# Altium PCB Parallel_CS.PcbDoc (part 2 of 3)
Units mm, origin at the board's own origin, x right, y up, seen from the top; angles counter-clockwise.
Board outline 81.03 x 171.07 mm, 4 copper layers (Top Layer, Ground Plane, Power Plane, Bottom Layer), stack 0.778 mm thick; 393 components, 189 nets, 1068 pads, 234 vias.
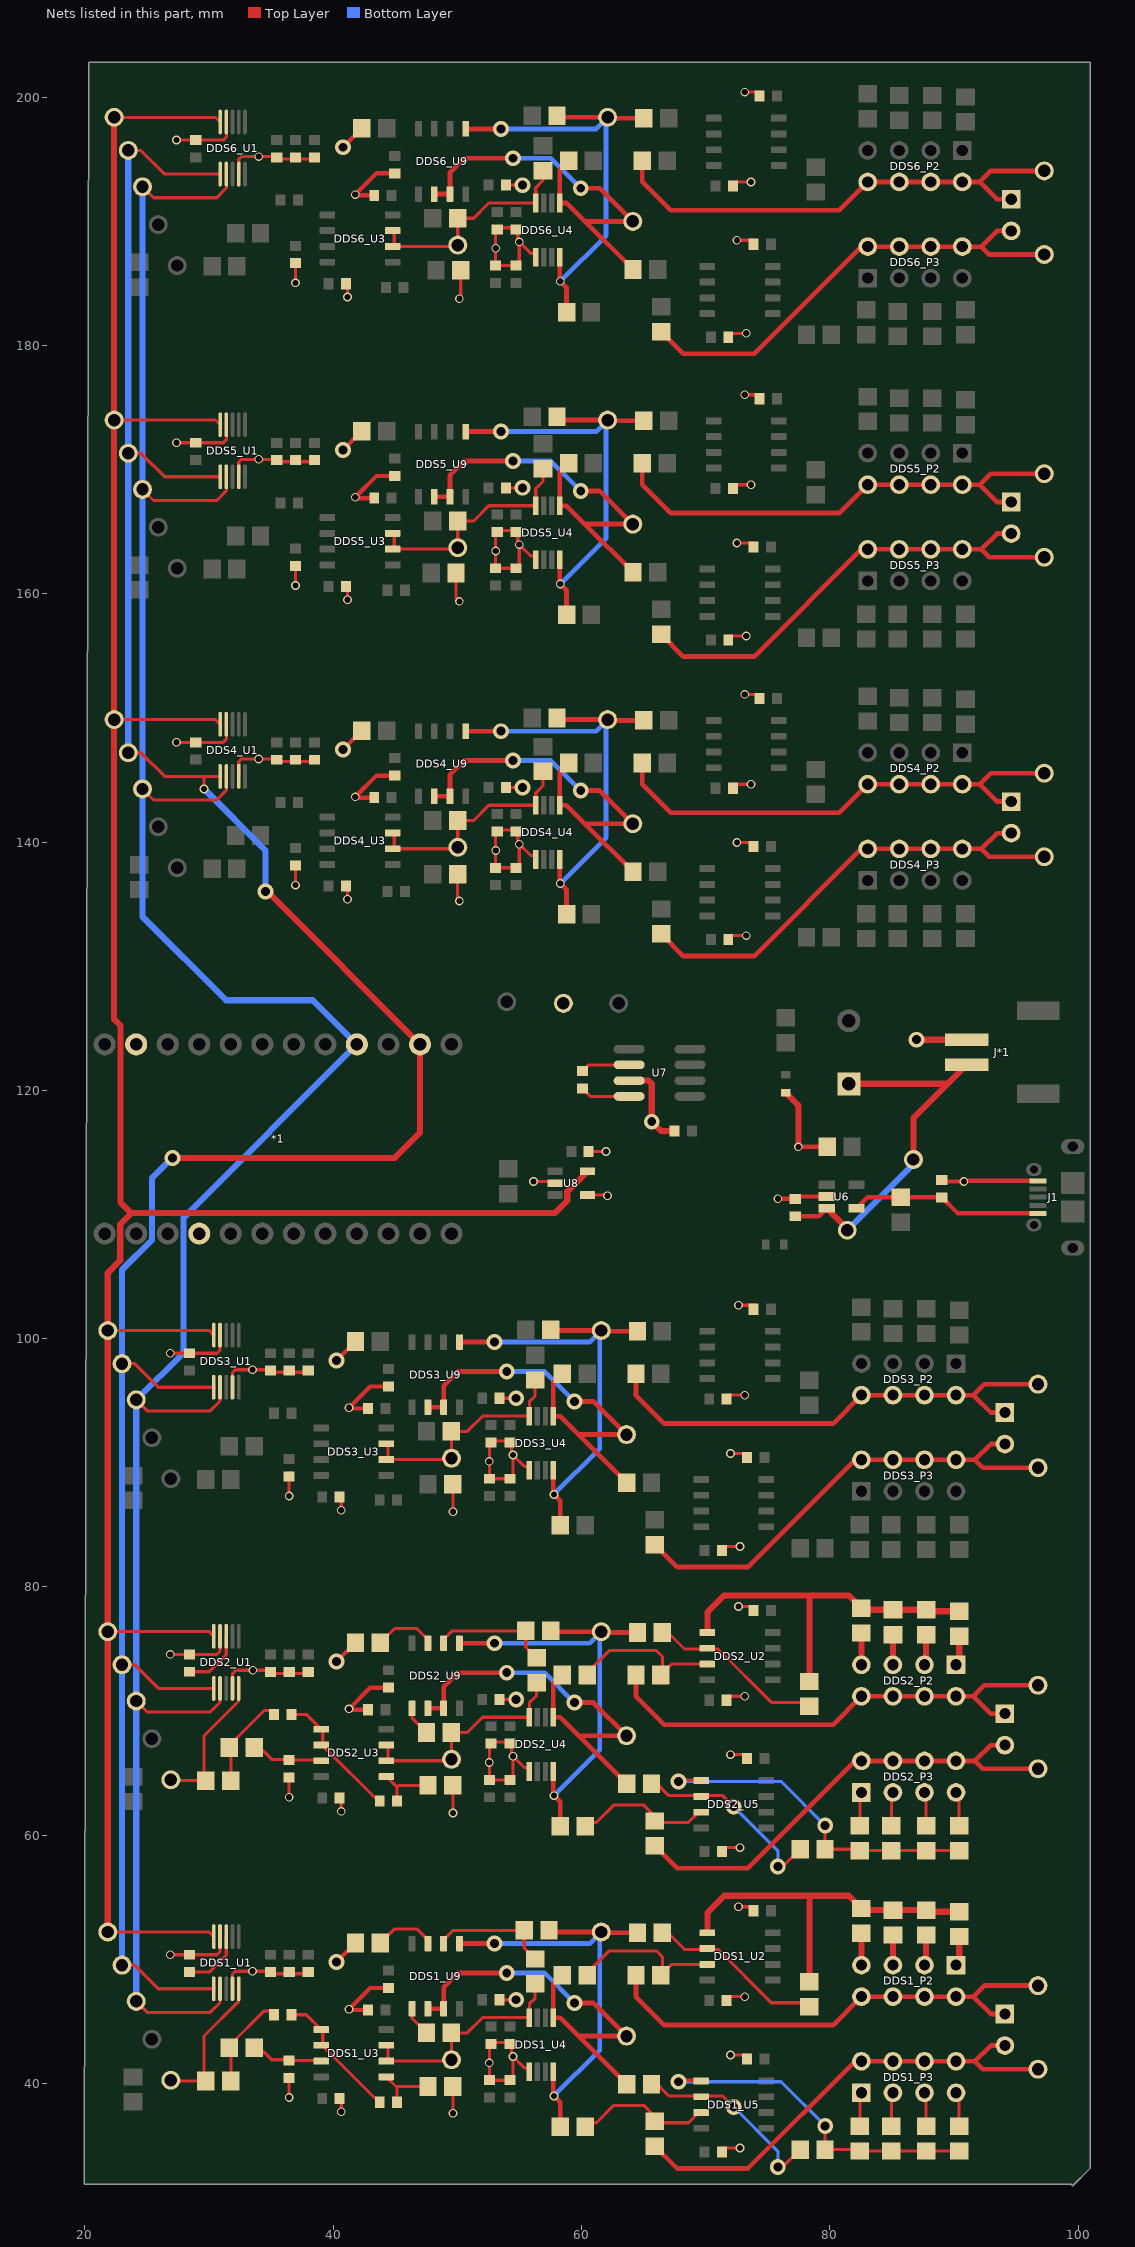
[diagram p4: the nets of this part, all layers, seen from the top]

## Part data
C18 C19 C20 C21 C22 DDS1_C1 DDS1_C2 DDS1_C3 DDS1_C4 DDS1_C5 DDS1_C6 DDS1_C7 DDS1_C8 DDS1_C9 DDS1_C10 DDS1_C11 DDS1_C12 DDS1_C13 DDS1_C14 DDS1_C15 DDS1_C16 DDS1_C17 DDS1_C23 DDS1_C24 DDS2_C1 DDS2_C2 DDS2_C3 DDS2_C4 DDS2_C5 DDS2_C6 DDS2_C7 DDS2_C8 DDS2_C9 DDS2_C10 DDS2_C11 DDS2_C12 DDS2_C13 DDS2_C14 DDS2_C15 DDS2_C16 DDS2_C17 DDS2_C23 DDS2_C24 DDS3_C1 DDS3_C2 DDS3_C3 DDS3_C4 DDS3_C5 DDS3_C6 DDS3_C7 DDS3_C8 DDS3_C9 DDS3_C10 DDS3_C11 DDS3_C12 DDS3_C13 DDS3_C14 DDS3_C15 DDS3_C16 DDS3_C17 DDS3_C23 DDS3_C24 DDS4_C1 DDS4_C2 DDS4_C3 DDS4_C4 DDS4_C5 DDS4_C6 DDS4_C7 DDS4_C8 DDS4_C9 DDS4_C10 DDS4_C11 DDS4_C12 DDS4_C13 DDS4_C14 DDS4_C15 DDS4_C16 DDS4_C17 DDS4_C23 DDS4_C24 DDS5_C1 DDS5_C2 DDS5_C3 DDS5_C4 DDS5_C5 DDS5_C6 DDS5_C7 DDS5_C8 DDS5_C9 DDS5_C10 DDS5_C11 DDS5_C12 DDS5_C13 DDS5_C14 DDS5_C15 DDS5_C16 DDS5_C17 DDS5_C23 DDS5_C24 DDS6_C1 DDS6_C2 DDS6_C3 DDS6_C4 DDS6_C5 DDS6_C6 DDS6_C7 DDS6_C8 DDS6_C9 DDS6_C10 DDS6_C11 DDS6_C12 DDS6_C13 DDS6_C14 DDS6_C15 DDS6_C16 DDS6_C17 DDS6_C23 DDS6_C24: library part "Cap Semi", "Capacitor (Semiconductor SIM Model)", LatestRevisionDate=29-May-2009, LatestRevisionNote="IPC-7351 Footprint Added.", PackageDescription="Chip Capacitor", PackageReference=C1206, Published=8-Jun-2000, Publisher="Altium Limited"
DDS1_P1 DDS2_P1 DDS3_P1 DDS4_P1 DDS5_P1 DDS6_P1: "Header, 2-Pin", LatestRevisionDate=17-Jul-2002, LatestRevisionNote="Re-released for DXP Platform.", Publisher="Altium Limited"
DDS1_P2 DDS1_P3 DDS2_P2 DDS2_P3 DDS3_P2 DDS3_P3 DDS4_P2 DDS4_P3 DDS5_P2 DDS5_P3 DDS6_P2 DDS6_P3: "Header, 4-Pin, Dual row", LatestRevisionDate=17-Jul-2002, LatestRevisionNote="Re-released for DXP Platform.", Publisher="Altium Limited"
DDS1_R1 DDS1_R2 DDS1_R3 DDS1_R4 DDS1_R5 DDS1_R6 DDS1_R7 DDS1_R8 DDS1_R9 DDS1_R10 DDS1_R11 DDS1_R12 DDS1_R13 DDS1_R18 DDS1_R19 DDS1_R20 DDS1_R21 DDS1_R22 DDS1_R23 DDS1_R24 DDS1_R25 DDS1_R26 DDS1_R27 DDS1_R28 DDS2_R1 DDS2_R2 DDS2_R3 DDS2_R4 DDS2_R5 DDS2_R6 DDS2_R7 DDS2_R8 DDS2_R9 DDS2_R10 DDS2_R11 DDS2_R12 DDS2_R13 DDS2_R18 DDS2_R19 DDS2_R20 DDS2_R21 DDS2_R22 DDS2_R23 DDS2_R24 DDS2_R25 DDS2_R26 DDS2_R27 DDS2_R28 DDS3_R1 DDS3_R2 DDS3_R3 DDS3_R4 DDS3_R5 DDS3_R6 DDS3_R7 DDS3_R8 DDS3_R9 DDS3_R10 DDS3_R11 DDS3_R12 DDS3_R13 DDS3_R18 DDS3_R19 DDS3_R20 DDS3_R21 DDS3_R22 DDS3_R23 DDS3_R24 DDS3_R25 DDS3_R26 DDS3_R27 DDS3_R28 DDS4_R1 DDS4_R2 DDS4_R3 DDS4_R4 DDS4_R5 DDS4_R6 DDS4_R7 DDS4_R8 DDS4_R9 DDS4_R10 DDS4_R11 DDS4_R12 DDS4_R13 DDS4_R18 DDS4_R19 DDS4_R20 DDS4_R21 DDS4_R22 DDS4_R23 DDS4_R24 DDS4_R25 DDS4_R26 DDS4_R27 DDS4_R28 DDS5_R1 DDS5_R2 DDS5_R3 DDS5_R4 DDS5_R5 DDS5_R6 DDS5_R7 DDS5_R8 DDS5_R9 DDS5_R10 DDS5_R11 DDS5_R12 DDS5_R13 DDS5_R18 DDS5_R19 DDS5_R20 DDS5_R21 DDS5_R22 DDS5_R23 DDS5_R24 DDS5_R25 DDS5_R26 DDS5_R27 DDS5_R28 DDS6_R1 DDS6_R2 DDS6_R3 DDS6_R4 DDS6_R5 DDS6_R6 DDS6_R7 DDS6_R8 DDS6_R9 DDS6_R10 DDS6_R11 DDS6_R12 DDS6_R13 DDS6_R18 DDS6_R19 DDS6_R20 DDS6_R21 DDS6_R22 DDS6_R23 DDS6_R24 DDS6_R25 DDS6_R26 DDS6_R27 DDS6_R28 R14 R15 R16 R17: library part Res1, "Resistor", LatestRevisionDate=17-Jul-2002, LatestRevisionNote="Re-released for DXP Platform.", PackageDescription="Axial Device, Thru-Hole; 2 Leads; 0.3 in Pin Spacing", PackageReference=AXIAL-0.3, Published=8-Jun-2000, Publisher="Altium Limited"
DDS1_U1 DDS2_U1 DDS3_U1 DDS4_U1 DDS5_U1 DDS6_U1: library part CMP-0293-00077-1, "Low Power, 12.65 mW, 2.3 V to 5.5 V, Programmable Waveform Generator, 10-Bit, Serial, RM-10, 50 Tube, Pb-Free", Code_JEDEC=MO-187-BA, Compliance Range (V)=650mV, ComponentLink1Description="Manufacturer URL", ComponentLink1URL=www.analog.com, ComponentLink2Description=Datasheet, ComponentLink2URL=http://www.analog.com/static/imported-files/data_sheets/AD9833.pdf, ComponentLink3Description="Package Specification", ComponentLink3URL=http://www.analog.com/static/imported-files/packages/PKG_PDF/MSOP%28RM%29/RM_10.pdf, DatasheetVersion="Rev. D", FS Iout (mA nom)=3mA, I/O Interface=Serial, I Supply total (max)=5.5mA, Master fclk=25MHz, PackageDescription="10-Lead Mini Small Outline Package [MSOP]", PackageReference=RM-10, PackageVersion=5/8/2005, REFCLK Multiplier=No, Resolution (Bits)=10bit, Tuning Word Width (bits)=28bit
DDS1_U2 DDS1_U3 DDS1_U5 DDS1_U9 DDS2_U2 DDS2_U3 DDS2_U5 DDS2_U9 DDS3_U2 DDS3_U3 DDS3_U5 DDS3_U9 DDS4_U2 DDS4_U3 DDS4_U5 DDS4_U9 DDS5_U2 DDS5_U3 DDS5_U5 DDS5_U9 DDS6_U2 DDS6_U3 DDS6_U5 DDS6_U9: library part CMP-0272-00241-3, "0.03 uV/degC, 6 uV Vos, Low Noise, Rail-to-Rail Output, Zero-Drift Operational Amplifier, 4 to 36 V, -40 to 105 degC, 8-pin SOIC (D8), Green (RoHS & no Sb/Br)", Manufacturer="Texas Instruments", Rating=Catalog, Total Supply Voltage(Max)(+5V is 5, +/-5V is 10)=36, Total Supply Voltage(Min)(+5V is 5, +/-5V is 10)=4, CMRR(Min)(dB)=120, Code_JEDEC=MS-012, ComponentLink1Description="Manufacturer URL", ComponentLink1URL=http://www.ti.com/, ComponentLink2Description=Datasheet, ComponentLink2URL=http://www.ti.com/lit/ds/symlink/opa2188.pdf, ComponentLink3Description="Package Specification", ComponentLink3URL=http://www.ti.com/litv/pdf/msoi002j, DatasheetVersion=SBOS525B, Eco-Plan="Green (RoHS & no Sb/Br)", GBW(Typ)(MHz)=2, IIB(Max)(pA)=850, Iq per channel(Max)(mA)=0.475, Mounting Technology="Surface Mount", Number of Channels=2, Offset Drift(Typ)(uV/C)=0.03, PackageDescription="8-Pin Plastic Small Outline, Body 4.9 x 3.9 mm, Pitch 1.27 mm", PackageReference=D0008A, PackageVersion="4040047-3/M, 06/2011", Packing="LARGE T&R", PartId=1, PartNumber=OPA2188AIDR, Slew Rate(Typ)(V/us)=0.8, Sub Family="High Supply Voltage Amplifier (>=30V), Low Noise Amp (<=10nV/rtHz), Low Offset Voltage Amplifier (<=500uV), Low Power Amp (<=500uA), Precision Amplifier, Zero Drift Precision Amplifier", Vio (25C)(Max)(mV)=0.025
DDS1_U4 DDS2_U4 DDS3_U4 DDS4_U4 DDS5_U4 DDS6_U4: "SP Amp DIFF AMP Single R-R O/P ±9V/18V 8-Pin MSOP Tube", Package="MSOP-8 Analog Devices", Availability=Good, MF="Analog Devices", MP=AD8476ARMZ, Price="4.14 USD"
DS1 DS2: library part CMP-1666-00027-1, "LED, RED, 2.1 V, -40 to 100 degC, 2-Pin SMD (0603), RoHS, Tape and Reel", Capacitance="12 pF", Case/Package=0603, Case Code (Metric)=1608, Max Operating Temperature=125degC, Min Operating Temperature=-55degC, Package Quantity=4000, Resistance="100000000000 Ohm", Tolerance=5%, Type (Capacitors)=C0G, Voltage Rating="50 V", Case Code (Imperial)=0603, ComponentLink1Description="Manufacturer URL", ComponentLink1URL=http://www.vishay.com/, ComponentLink2Description=Datasheet, ComponentLink2URL=http://www.vishay.com/docs/83173/tlmb1100.pdf, DatasheetVersion="Rev. 2.7, 03/2016", Height="0.8 mm", Length="1.6 mm", Mount="Surface Mount", PackageDescription="2-Pin Surface Mount Device, Body 1.6 x 0.8 mm", PackageReference=TLMX1100, Packaging="Tape and Reel", Pins=2, Radiation Hardening=No, REACH SVHC="No SVHC", RoHSCompliant=True, Voltage Rating (DC)="50 V", Width="0.8 mm"
J1: library part CMP-1349-00001-2, "USB 2.0 Standard Micro-USB Connector, Micro AB-Standard (Bottom Mount), 30 V AC, -30 to 85 degC, Right Angle, 5-Pin 7.5 x 5.6 x 2.8 mm SMD, RoHS, Reel", Capacitance="2 pF Max.", Contact Resistance="30 mOhm Max.", Manufacturer="Hirose Electric", Operating Temperature Range="-30 to 85 degC", Voltage Rating="30 V AC", ComponentLink1Description="Manufacturer URL", ComponentLink1URL=http://www.hirose.com/, ComponentLink2Description=Datasheet, ComponentLink2URL=http://www.hirose.co.jp/cataloge_hp/ed_ZX_20140804.pdf, ComponentLink3Description="Package Specification", ComponentLink3URL=http://www.hirose.co.jp/cataloge_hp/ed_ZX_20140804.pdf, DatasheetVersion=Aug-14, Mounting Technology="Surface Mount", Number of Contacts=5, PackageDescription="USB Micro-AB Connector, Right Angle, Body 7.5 x 5.6 mm, Pitch 0.65 mm, Height 2.8 mm", Packing=Reel, PartNumber=ZX62D-AB-5P8, RoHS=TRUE
S1: "Single-Pole, Single-Throw Switch", LatestRevisionDate=17-Jul-2002, LatestRevisionNote="Re-released for DXP Platform.", PackageDescription="Switch; 2 Leads", PackageReference=SPST-2, Published=24-Mar-1999, Publisher="Altium Limited"
U6: library part CMP-0133-00142-1, "Miniature Single-Cell, Fully Integrated Li-Ion, Li-Polymer Charge Management Controller, 4.2V, 5-Pin SOT-23, Industrial Temperature, Tape and Reel", Code_IPC=SOT23-5, DatasheetVersion="revE, Sep-2008", PackageDescription="5-Lead Plastic Small Outline Transistor (OT) [SOT-23]", PackageReference=SOT-23-OT5, PackageVersion="revBB, Aug-2009"
U7: library part CMP-0475-00491-1, "12 V CMOS Voltage Converter, 8-pin SOIC (S8-8), 0 to 70 degC", Frequency(kHz)=5, Manufacturer="Linear Technology", ComponentLink1Description="Manufacturer URL", ComponentLink1URL=http://www.linear.com/, ComponentLink2Description=Datasheet, ComponentLink2URL=http://cds.linear.com/docs/en/datasheet/lt1044a.pdf, ComponentLink3Description="Package Specification", ComponentLink3URL=http://cds.linear.com/docs/en/packaging/05081610_G_SO8.pdf, DatasheetVersion="Rev. 0", Isupply(mA)=0.2, Max Iout(mA)=20, Mounting Technology="Surface Mount", PackageDescription="8-Pin Plastic Small Outline (Narrow .150 Inch), Body 4.9 x 3.9 mm, Pitch 1.27 mm", PackageReference=S8-8, PackageVersion="Rev. G, 03/2012", PartNumber=LTC1044ACS8, RoHS=FALSE, Vin Max(V)=12, Vin Min(V)=1.5, Voutput="2Vin, -Vin, 0.5Vin"
U8: library part CMP-2000-06612-1, "Low Power, Resistor Set Oscillator, 1 KHz to 20 MHz, 2.7 to 5.5 V, -40 to 85 degC, 5-Pin SOT-23 (S5), Pb-Free", Digital IC Case Style=SOT-23, Frequency=20MHz, Manufacturer="Linear Technology", Operating Temperature Max=85°C, Operating Temperature Min=-40°C, Operating Temperature Range=-40°Cto+85°C, Package Description="5-Pin Small Outline Transistor, Body 2.9 x 1.625 mm, Pitch 0.95 mm", Package Reference=TSOT23-5, Supply Voltage Max=5.5V, Supply Voltage Min=2.7V, Supply Voltage Range=2.7Vto5.5V, Base Number=6900, Clock External Input=No, Datasheet URL=http://cds.linear.com/docs/en/datasheet/6900fa.pdf, Datasheet Version="Rev. A, 07/2009", Manufacturer URL=http://www.linear.com/, Mounting Technology=SurfaceMount, MSL=MSL1-Unlimited, No. of Pins=5, Operating Frequency Max=20MHz, Package / Case=SOT-23, SVHC=NoSVHC(19-Dec-2012), Termination Type=SMD

## Via types
v1: diameter 0.7, hole 0.5, Top Layer to Bottom Layer, 143 vias
v2: diameter 1.27, hole 0.711, Top Layer to Bottom Layer, 76 vias
v3: diameter 1.27, hole 0.711, Top Layer to Bottom Layer, tented both sides, 9 vias
v4: diameter 1.5, hole 1, Top Layer to Bottom Layer, 6 vias

## Nets (pads, with @x,y where several pads share a name; then routed paths per layer and width w, separated by ;. In a path a pad name is that pad's centre, name@x,y a point inside that pad or via, vN(x,y) a via of type N, cw(c..) or ccw(c..) an arc to the next point about the centre after c; other vN are vias at no path point)
DDS1_DDS_CLK: DDS1_TP6.1 DDS1_U1.5 DDS2_TP6.1 DDS2_U1.5 DDS3_TP6.1 DDS3_U1.5 DDS4_TP6.1 DDS4_U1.5 DDS5_TP6.1 DDS5_U1.5 DDS6_TP6.1 DDS6_U1.5 U8.5 | length 238.3
  Top Layer w0.254: DDS1_TP6.1@21.844,52.197 30.013,52.197 DDS1_U1.5@30.385,51.825 ; DDS2_TP6.1@21.844,76.392 30.013,76.392 DDS2_U1.5@30.385,76.02 ; DDS3_TP6.1@21.844,100.649 30.013,100.649 DDS3_U1.5@30.385,100.277 ; DDS4_TP6.1@22.352,149.86 30.521,149.86 DDS4_U1.5@30.893,149.488 ; DDS5_TP6.1@22.352,173.99 30.521,173.99 DDS5_U1.5@30.893,173.618 ; DDS6_TP6.1@22.352,198.374 30.521,198.374 DDS6_U1.5@30.893,198.002
  Top Layer w0.5: DDS1_TP6.1@21.844,52.197 DDS2_TP6.1@21.844,76.392 DDS3_TP6.1@21.844,100.649 21.844,105.283 22.854,106.293 22.854,109.214 23.749,110.109 ; DDS6_TP6.1@22.352,198.374 DDS5_TP6.1@22.352,173.99 DDS4_TP6.1@22.352,149.86 22.352,125.73 22.86,125.222 22.86,110.998 23.749,110.109 ; U8.5@60.492,113.472 58.857,111.837 58.857,111.107 57.859,110.109 23.749,110.109
DDS1_DDS_FILT_OUT: DDS1_R26.2 DDS1_R28.2 DDS1_TP2.1 DDS1_U3.6 DDS1_U3.7 DDS1_U4.8 | length 18.3
  Top Layer w0.254: DDS1_U3.6@44.281,41.799 49.419,41.799 DDS1_TP2.1@49.53,41.91 49.53,44.053 DDS1_R28.2@49.514,44.069 50.8,44.069 52.03,45.299 DDS1_U4.8@55.804,45.299 55.804,46.406 56.261,46.863 DDS1_R26.2@56.261,48.022 ; DDS1_U3.6@44.408,41.91 DDS1_U3.7@44.408,43.053
DDS1_I_OUT_N: DDS1_P1.2 DDS1_P3.2 DDS1_P3.4 DDS1_P3.6 DDS1_P3.8 DDS1_R13.2 DDS1_TP8.1 | length 38.1
  Top Layer w0.381: DDS1_R13.2@66.278,34.941 DDS1_R13.2@65.913,34.941 67.707,33.147 73.406,33.147 82.042,41.783 DDS1_P3.2@82.55,41.783 DDS1_P3.4@85.09,41.783 DDS1_P3.6@87.63,41.783 DDS1_P3.8@90.17,41.783 91.694,41.783 ; DDS1_P1.2@94.107,43.053 92.964,43.053 91.694,41.783 ; DDS1_TP8.1@96.139,41.148 92.329,41.148 91.694,41.783
DDS1_I_OUT_P: DDS1_P1.1 DDS1_P2.2 DDS1_P2.4 DDS1_P2.6 DDS1_P2.8 DDS1_R8.2 DDS1_TP7.1 | length 38.8
  Top Layer w0.381: DDS1_R8.2@64.389,48.703 64.389,46.99 66.675,44.704 80.264,44.704 DDS1_P2.8@82.55,46.99 DDS1_P2.6@85.09,46.99 DDS1_P2.4@87.63,46.99 DDS1_P2.2@90.17,46.99 91.567,46.99 ; DDS1_P1.1@94.107,45.593 92.964,45.593 91.567,46.99 ; DDS1_TP7.1@96.139,47.879 92.456,47.879 91.567,46.99
DDS1_SPI_SCLK: *1.21 DDS1_TP4.1 DDS1_U1.7 DDS2_TP4.1 DDS2_U1.7 DDS3_TP4.1 DDS3_U1.7 DDS4_TP4.1 DDS4_U1.7 DDS5_TP4.1 DDS5_U1.7 DDS6_TP4.1 DDS6_U1.7 | length 216.2
  Top Layer w0.254: DDS1_TP4.1@24.13,46.609 25.019,45.72 30.099,45.72 30.885,46.506 DDS1_U1.7@30.885,47.625 ; DDS2_TP4.1@24.13,70.804 25.019,69.915 30.099,69.915 30.885,70.701 DDS2_U1.7@30.885,71.82 ; DDS3_TP4.1@24.13,95.061 25.019,94.172 30.099,94.172 30.885,94.958 DDS3_U1.7@30.885,96.077 ; DDS4_TP4.1@24.638,144.272 25.527,143.383 30.607,143.383 31.393,144.169 DDS4_U1.7@31.393,145.288 ; DDS5_TP4.1@24.638,168.402 25.527,167.513 30.607,167.513 31.393,168.299 DDS5_U1.7@31.393,169.418 ; DDS6_TP4.1@24.638,192.786 25.527,191.897 30.607,191.897 31.393,192.683 DDS6_U1.7@31.393,193.802
  Bottom Layer w0.5: DDS1_TP4.1@24.13,46.609 DDS2_TP4.1@24.13,70.804 DDS3_TP4.1@24.13,95.061 24.139,95.061 27.946,98.868 27.946,109.734 *1.21@41.91,123.698 38.354,127.254 31.369,127.254 24.638,133.985 DDS4_TP4.1@24.638,144.272 DDS5_TP4.1@24.638,168.402 DDS6_TP4.1@24.638,192.786
DDS1_SPI_SDATA: *1.23 DDS1_TP5.1 DDS1_U1.6 DDS2_TP5.1 DDS2_U1.6 DDS3_TP5.1 DDS3_U1.6 DDS4_TP5.1 DDS4_U1.6 DDS5_TP5.1 DDS5_U1.6 DDS6_TP5.1 DDS6_U1.6 | length 221.1
  Top Layer w0.254: DDS1_TP5.1@22.987,49.53 24.003,49.53 25.908,47.625 DDS1_U1.6@30.385,47.625 ; DDS2_TP5.1@22.987,73.725 24.003,73.725 25.908,71.82 DDS2_U1.6@30.385,71.82 ; DDS3_TP5.1@22.987,97.982 24.003,97.982 25.908,96.077 DDS3_U1.6@30.385,96.077 ; DDS4_TP5.1@23.495,147.193 24.511,147.193 26.416,145.288 29.591,145.288 ; DDS5_TP5.1@23.495,171.323 24.511,171.323 26.416,169.418 DDS5_U1.6@30.893,169.418 ; DDS6_TP5.1@23.495,195.707 24.511,195.707 26.416,193.802 DDS6_U1.6@30.893,193.802 ; v1(29.591,144.272) 29.591,145.288 ; DDS4_U1.6@30.893,145.288 29.591,145.288
  Top Layer w0.5: v3(27.051,114.554) 44.958,114.554 46.99,116.586 *1.23@46.99,123.698 34.671,136.017 v2(34.544,136.017)
  Bottom Layer w0.5: DDS1_TP5.1@22.987,49.53 DDS2_TP5.1@22.987,73.725 DDS3_TP5.1@22.987,97.982 22.987,105.527 25.394,107.934 25.394,112.897 v3(27.051,114.554) ; DDS4_TP5.1@23.495,147.193 DDS5_TP5.1@23.495,171.323 DDS6_TP5.1@23.495,195.707 ; v1(29.591,144.272) 34.544,139.319 v2(34.544,136.017)
DDS1_VDIFF_N: DDS1_R7.1 DDS1_R9.1 DDS1_TP10.1 DDS1_U4.5 DDS1_U9.6 DDS1_U9.7 | length 36
  Top Layer w0.381: DDS1_U9.6@47.625,46.016 DDS1_U9.7@48.895,46.016 48.895,47.752 50.038,48.895 v2(53.975,48.895) ; DDS1_R7.1@58.452,48.703 57.734,47.985 DDS1_U4.5@57.734,45.299 58.284,45.299 59.768,43.815 ; v2(59.436,46.482) 60.96,46.482 DDS1_TP10.1@63.627,43.815 59.768,43.815 ; DDS1_R9.1@63.643,39.94 59.768,43.815
  Bottom Layer w0.381: v2(53.975,48.895) 57.023,48.895 v2(59.436,46.482)
DDS1_VDIFF_P: DDS1_R1.1 DDS1_R12.1 DDS1_R25.1 DDS1_TP9.1 DDS1_U4.4 DDS1_U9.1 | length 38.1
  Top Layer w0.381: DDS1_U9.1@50.181,51.282 DDS1_U9.1@50.165,51.266 v2(53.001,51.266) ; DDS1_R25.1@57.515,52.197 DDS1_TP9.1@61.595,52.197 61.66,52.132 DDS1_R1.1@64.516,52.132 ; DDS1_U4.4@57.734,40.931 57.734,39.04 v1(57.785,38.989) 58.293,38.481 DDS1_R12.1@58.293,36.511
  Bottom Layer w0.381: v2(53.001,51.266) 60.664,51.266 DDS1_TP9.1@61.468,52.07 ; v1(57.785,38.989) 61.468,42.672 DDS1_TP9.1@61.468,52.07 ; DDS1_TP9.1@61.595,52.197 DDS1_TP9.1@61.468,52.07
DDS2_DDS_FILT_OUT: DDS2_R26.2 DDS2_R28.2 DDS2_TP2.1 DDS2_U3.6 DDS2_U3.7 DDS2_U4.8 | length 18.4
  Top Layer w0.254: DDS2_U3.6@44.281,65.994 49.419,65.994 DDS2_TP2.1@49.53,66.105 49.53,68.248 DDS2_R28.2@49.514,68.264 50.8,68.264 52.03,69.494 DDS2_U4.8@55.804,69.494 55.804,70.663 56.388,71.247 DDS2_R26.2@56.388,72.279 ; DDS2_U3.6@44.408,66.105 DDS2_U3.7@44.408,67.248
DDS2_I_OUT_N: DDS2_P1.2 DDS2_P3.2 DDS2_P3.4 DDS2_P3.6 DDS2_P3.8 DDS2_R13.2 DDS2_TP8.1 | length 38.1
  Top Layer w0.381: DDS2_R13.2@66.278,59.136 DDS2_R13.2@65.913,59.136 67.707,57.342 73.406,57.342 82.042,65.978 DDS2_P3.2@82.55,65.978 DDS2_P3.4@85.09,65.978 DDS2_P3.6@87.63,65.978 DDS2_P3.8@90.17,65.978 91.694,65.978 ; DDS2_P1.2@94.107,67.248 92.964,67.248 91.694,65.978 ; DDS2_TP8.1@96.139,65.343 92.329,65.343 91.694,65.978
DDS2_I_OUT_P: DDS2_P1.1 DDS2_P2.2 DDS2_P2.4 DDS2_P2.6 DDS2_P2.8 DDS2_R8.2 DDS2_TP7.1 | length 38.8
  Top Layer w0.381: DDS2_R8.2@64.389,72.898 64.389,71.185 66.675,68.899 80.264,68.899 DDS2_P2.8@82.55,71.185 91.567,71.185 ; DDS2_P1.1@94.107,69.788 92.964,69.788 91.567,71.185 ; DDS2_TP7.1@96.139,72.074 92.456,72.074 91.567,71.185
DDS2_VDIFF_N: DDS2_R7.1 DDS2_R9.1 DDS2_TP10.1 DDS2_U4.5 DDS2_U9.6 DDS2_U9.7 | length 36
  Top Layer w0.381: DDS2_U9.6@47.625,70.211 DDS2_U9.7@48.895,70.211 48.895,71.947 50.038,73.09 v2(53.975,73.09) ; DDS2_R7.1@58.452,72.898 57.734,72.18 DDS2_U4.5@57.734,69.494 58.284,69.494 59.768,68.01 ; v2(59.436,70.677) 60.96,70.677 DDS2_TP10.1@63.627,68.01 59.768,68.01 ; DDS2_R9.1@63.643,64.135 59.768,68.01
  Bottom Layer w0.381: v2(53.975,73.09) 57.023,73.09 v2(59.436,70.677)
DDS2_VDIFF_P: DDS2_R1.1 DDS2_R12.1 DDS2_R25.1 DDS2_TP9.1 DDS2_U4.4 DDS2_U9.1 | length 38.1
  Top Layer w0.381: DDS2_U9.1@50.181,75.477 DDS2_U9.1@50.165,75.461 v2(53.001,75.461) ; DDS2_R25.1@57.515,76.392 DDS2_TP9.1@61.595,76.392 61.66,76.327 DDS2_R1.1@64.516,76.327 ; DDS2_U4.4@57.734,65.126 57.734,63.235 v1(57.785,63.184) 58.293,62.676 DDS2_R12.1@58.293,60.706
  Bottom Layer w0.381: v2(53.001,75.461) 60.664,75.461 DDS2_TP9.1@61.468,76.265 ; v1(57.785,63.184) 61.468,66.867 DDS2_TP9.1@61.468,76.265 ; DDS2_TP9.1@61.595,76.392 DDS2_TP9.1@61.468,76.265
DDS3_DDS_FILT_OUT: DDS3_R26.2 DDS3_R28.2 DDS3_TP2.1 DDS3_U3.6 DDS3_U3.7 DDS3_U4.8 | length 18.5
  Top Layer w0.254: DDS3_U3.6@44.281,90.251 49.419,90.251 DDS3_TP2.1@49.53,90.362 49.53,92.505 DDS3_R28.2@49.514,92.521 50.8,92.521 52.03,93.751 DDS3_U4.8@55.804,93.751 55.804,94.92 56.261,95.377 DDS3_R26.2@56.261,96.663 ; DDS3_U3.6@44.408,90.362 DDS3_U3.7@44.408,91.505
DDS3_I_OUT_N: DDS3_P1.2 DDS3_P3.2 DDS3_P3.4 DDS3_P3.6 DDS3_P3.8 DDS3_R13.2 DDS3_TP8.1 | length 38.1
  Top Layer w0.381: DDS3_R13.2@66.278,83.393 DDS3_R13.2@65.913,83.393 67.707,81.599 73.406,81.599 82.042,90.235 DDS3_P3.2@82.55,90.235 DDS3_P3.4@85.09,90.235 DDS3_P3.6@87.63,90.235 DDS3_P3.8@90.17,90.235 91.694,90.235 ; DDS3_P1.2@94.107,91.505 92.964,91.505 91.694,90.235 ; DDS3_TP8.1@96.139,89.6 92.329,89.6 91.694,90.235
DDS3_I_OUT_P: DDS3_P1.1 DDS3_P2.2 DDS3_P2.4 DDS3_P2.6 DDS3_P2.8 DDS3_R8.2 DDS3_TP7.1 | length 38.8
  Top Layer w0.381: DDS3_R8.2@64.389,97.155 64.389,95.442 66.675,93.156 80.264,93.156 DDS3_P2.8@82.55,95.442 91.567,95.442 ; DDS3_P1.1@94.107,94.045 92.964,94.045 91.567,95.442 ; DDS3_TP7.1@96.139,96.331 92.456,96.331 91.567,95.442
DDS3_VDIFF_N: DDS3_R7.1 DDS3_R9.1 DDS3_TP10.1 DDS3_U4.5 DDS3_U9.6 DDS3_U9.7 | length 36
  Top Layer w0.381: DDS3_U9.6@47.625,94.468 DDS3_U9.7@48.895,94.468 48.895,96.204 50.038,97.347 v2(53.975,97.347) ; DDS3_R7.1@58.452,97.155 57.734,96.437 DDS3_U4.5@57.734,93.751 58.284,93.751 59.768,92.267 ; v2(59.436,94.934) 60.96,94.934 DDS3_TP10.1@63.627,92.267 59.768,92.267 ; DDS3_R9.1@63.643,88.392 59.768,92.267
  Bottom Layer w0.381: v2(53.975,97.347) 57.023,97.347 v2(59.436,94.934)
DDS3_VDIFF_P: DDS3_R1.1 DDS3_R12.1 DDS3_R25.1 DDS3_TP9.1 DDS3_U4.4 DDS3_U9.1 | length 38.1
  Top Layer w0.381: DDS3_U9.1@50.181,99.734 DDS3_U9.1@50.165,99.718 v2(53.001,99.718) ; DDS3_R25.1@57.515,100.649 DDS3_TP9.1@61.595,100.649 61.66,100.584 DDS3_R1.1@64.516,100.584 ; DDS3_U4.4@57.734,89.383 57.734,87.492 v1(57.785,87.441) 58.293,86.933 DDS3_R12.1@58.293,84.963
  Bottom Layer w0.381: v2(53.001,99.718) 60.664,99.718 DDS3_TP9.1@61.468,100.522 ; v1(57.785,87.441) 61.468,91.124 DDS3_TP9.1@61.468,100.522 ; DDS3_TP9.1@61.595,100.649 DDS3_TP9.1@61.468,100.522
DDS4_DDS_FILT_OUT: DDS4_R26.2 DDS4_R28.2 DDS4_TP2.1 DDS4_U3.6 DDS4_U3.7 DDS4_U4.8 | length 18.4
  Top Layer w0.254: DDS4_U3.6@44.789,139.462 49.927,139.462 DDS4_TP2.1@50.038,139.573 50.038,141.716 DDS4_R28.2@50.022,141.732 51.308,141.732 52.538,142.962 DDS4_U4.8@56.312,142.962 56.312,143.942 56.896,144.526 DDS4_R26.2@56.896,145.685 ; DDS4_U3.6@44.916,139.573 DDS4_U3.7@44.916,140.716
DDS4_I_OUT_N: DDS4_P1.2 DDS4_P3.2 DDS4_P3.4 DDS4_P3.6 DDS4_P3.8 DDS4_R13.2 DDS4_TP8.1 | length 38.1
  Top Layer w0.381: DDS4_R13.2@66.786,132.604 DDS4_R13.2@66.421,132.604 68.215,130.81 73.914,130.81 82.55,139.446 DDS4_P3.2@83.058,139.446 DDS4_P3.4@85.598,139.446 DDS4_P3.6@88.138,139.446 DDS4_P3.8@90.678,139.446 92.202,139.446 ; DDS4_P1.2@94.615,140.716 93.472,140.716 92.202,139.446 ; DDS4_TP8.1@96.647,138.811 92.837,138.811 92.202,139.446
DDS4_I_OUT_P: DDS4_P1.1 DDS4_P2.2 DDS4_P2.4 DDS4_P2.6 DDS4_P2.8 DDS4_R8.2 DDS4_TP7.1 | length 38.8
  Top Layer w0.381: DDS4_R8.2@64.897,146.366 64.897,144.653 67.183,142.367 80.772,142.367 DDS4_P2.8@83.058,144.653 DDS4_P2.6@85.598,144.653 DDS4_P2.4@88.138,144.653 DDS4_P2.2@90.678,144.653 92.075,144.653 ; DDS4_P1.1@94.615,143.256 93.472,143.256 92.075,144.653 ; DDS4_TP7.1@96.647,145.542 92.964,145.542 92.075,144.653
DDS4_VDIFF_N: DDS4_R7.1 DDS4_R9.1 DDS4_TP10.1 DDS4_U4.5 DDS4_U9.6 DDS4_U9.7 | length 36
  Top Layer w0.381: DDS4_U9.6@48.133,143.679 DDS4_U9.7@49.403,143.679 49.403,145.415 50.546,146.558 v2(54.483,146.558) ; DDS4_R7.1@58.96,146.366 58.242,145.648 DDS4_U4.5@58.242,142.962 58.792,142.962 60.276,141.478 ; v2(59.944,144.145) 61.468,144.145 DDS4_TP10.1@64.135,141.478 60.276,141.478 ; DDS4_R9.1@64.151,137.603 60.276,141.478
  Bottom Layer w0.381: v2(54.483,146.558) 57.531,146.558 v2(59.944,144.145)
DDS4_VDIFF_P: DDS4_R1.1 DDS4_R12.1 DDS4_R25.1 DDS4_TP9.1 DDS4_U4.4 DDS4_U9.1 | length 38.1
  Top Layer w0.381: DDS4_U9.1@50.689,148.945 DDS4_U9.1@50.673,148.929 v2(53.509,148.929) ; DDS4_R25.1@58.023,149.86 DDS4_TP9.1@62.103,149.86 62.168,149.795 DDS4_R1.1@65.024,149.795 ; DDS4_U4.4@58.242,138.594 58.242,136.703 v1(58.293,136.652) 58.801,136.144 DDS4_R12.1@58.801,134.174
  Bottom Layer w0.381: v2(53.509,148.929) 61.172,148.929 DDS4_TP9.1@61.976,149.733 ; v1(58.293,136.652) 61.976,140.335 DDS4_TP9.1@61.976,149.733 ; DDS4_TP9.1@62.103,149.86 DDS4_TP9.1@61.976,149.733
DDS5_DDS_FILT_OUT: DDS5_R26.2 DDS5_R28.2 DDS5_TP2.1 DDS5_U3.6 DDS5_U3.7 DDS5_U4.8 | length 18.6
  Top Layer w0.254: DDS5_U3.6@44.789,163.592 49.927,163.592 DDS5_TP2.1@50.038,163.703 50.038,165.846 DDS5_R28.2@50.022,165.862 51.308,165.862 52.538,167.092 DDS5_U4.8@56.312,167.092 56.312,168.453 56.896,169.037 DDS5_R26.2@56.896,170.069 ; DDS5_U3.6@44.916,163.703 DDS5_U3.7@44.916,164.846
DDS5_I_OUT_N: DDS5_P1.2 DDS5_P3.2 DDS5_P3.4 DDS5_P3.6 DDS5_P3.8 DDS5_R13.2 DDS5_TP8.1 | length 38.1
  Top Layer w0.381: DDS5_R13.2@66.786,156.734 DDS5_R13.2@66.421,156.734 68.215,154.94 73.914,154.94 82.55,163.576 DDS5_P3.2@83.058,163.576 DDS5_P3.4@85.598,163.576 DDS5_P3.6@88.138,163.576 DDS5_P3.8@90.678,163.576 92.202,163.576 ; DDS5_P1.2@94.615,164.846 93.472,164.846 92.202,163.576 ; DDS5_TP8.1@96.647,162.941 92.837,162.941 92.202,163.576
DDS5_I_OUT_P: DDS5_P1.1 DDS5_P2.2 DDS5_P2.4 DDS5_P2.6 DDS5_P2.8 DDS5_R8.2 DDS5_TP7.1 | length 38.8
  Top Layer w0.381: DDS5_R8.2@64.897,170.496 64.897,168.783 67.183,166.497 80.772,166.497 DDS5_P2.8@83.058,168.783 DDS5_P2.6@85.598,168.783 DDS5_P2.4@88.138,168.783 DDS5_P2.2@90.678,168.783 92.075,168.783 ; DDS5_P1.1@94.615,167.386 93.472,167.386 92.075,168.783 ; DDS5_TP7.1@96.647,169.672 92.964,169.672 92.075,168.783
DDS5_VDIFF_N: DDS5_R7.1 DDS5_R9.1 DDS5_TP10.1 DDS5_U4.5 DDS5_U9.6 DDS5_U9.7 | length 36
  Top Layer w0.381: DDS5_U9.6@48.133,167.809 DDS5_U9.7@49.403,167.809 49.403,169.545 50.546,170.688 v2(54.483,170.688) ; DDS5_R7.1@58.96,170.496 58.242,169.778 DDS5_U4.5@58.242,167.092 58.792,167.092 60.276,165.608 ; v2(59.944,168.275) 61.468,168.275 DDS5_TP10.1@64.135,165.608 60.276,165.608 ; DDS5_R9.1@64.151,161.733 60.276,165.608
  Bottom Layer w0.381: v2(54.483,170.688) 57.531,170.688 v2(59.944,168.275)
DDS5_VDIFF_P: DDS5_R1.1 DDS5_R12.1 DDS5_R25.1 DDS5_TP9.1 DDS5_U4.4 DDS5_U9.1 | length 38.1
  Top Layer w0.381: DDS5_U9.1@50.689,173.075 DDS5_U9.1@50.673,173.059 v2(53.509,173.059) ; DDS5_R25.1@58.023,173.99 DDS5_TP9.1@62.103,173.99 62.168,173.925 DDS5_R1.1@65.024,173.925 ; DDS5_U4.4@58.242,162.724 58.242,160.833 v1(58.293,160.782) 58.801,160.274 DDS5_R12.1@58.801,158.304
  Bottom Layer w0.381: v2(53.509,173.059) 61.172,173.059 DDS5_TP9.1@61.976,173.863 ; v1(58.293,160.782) 61.976,164.465 DDS5_TP9.1@61.976,173.863 ; DDS5_TP9.1@62.103,173.99 DDS5_TP9.1@61.976,173.863
DDS6_DDS_FILT_OUT: DDS6_R26.2 DDS6_R28.2 DDS6_TP2.1 DDS6_U3.6 DDS6_U3.7 DDS6_U4.8 | length 18.2
  Top Layer w0.254: DDS6_U3.6@44.789,187.976 49.927,187.976 DDS6_TP2.1@50.038,188.087 50.038,190.23 DDS6_R28.2@50.022,190.246 51.308,190.246 52.538,191.476 DDS6_U4.8@56.312,191.476 56.312,192.71 56.896,193.294 DDS6_R26.2@56.896,194.072 ; DDS6_U3.6@44.916,188.087 DDS6_U3.7@44.916,189.23
DDS6_I_OUT_N: DDS6_P1.2 DDS6_P3.2 DDS6_P3.4 DDS6_P3.6 DDS6_P3.8 DDS6_R13.2 DDS6_TP8.1 | length 38.1
  Top Layer w0.381: DDS6_R13.2@66.786,181.118 DDS6_R13.2@66.421,181.118 68.215,179.324 73.914,179.324 82.55,187.96 DDS6_P3.2@83.058,187.96 DDS6_P3.4@85.598,187.96 DDS6_P3.6@88.138,187.96 DDS6_P3.8@90.678,187.96 92.202,187.96 ; DDS6_P1.2@94.615,189.23 93.472,189.23 92.202,187.96 ; DDS6_TP8.1@96.647,187.325 92.837,187.325 92.202,187.96
DDS6_I_OUT_P: DDS6_P1.1 DDS6_P2.2 DDS6_P2.4 DDS6_P2.6 DDS6_P2.8 DDS6_R8.2 DDS6_TP7.1 | length 38.8
  Top Layer w0.381: DDS6_R8.2@64.897,194.88 64.897,193.167 67.183,190.881 80.772,190.881 DDS6_P2.8@83.058,193.167 DDS6_P2.6@85.598,193.167 DDS6_P2.4@88.138,193.167 DDS6_P2.2@90.678,193.167 92.075,193.167 ; DDS6_P1.1@94.615,191.77 93.472,191.77 92.075,193.167 ; DDS6_TP7.1@96.647,194.056 92.964,194.056 92.075,193.167
DDS6_VDIFF_N: DDS6_R7.1 DDS6_R9.1 DDS6_TP10.1 DDS6_U4.5 DDS6_U9.6 DDS6_U9.7 | length 36
  Top Layer w0.381: DDS6_U9.6@48.133,192.193 DDS6_U9.7@49.403,192.193 49.403,193.929 50.546,195.072 v2(54.483,195.072) ; DDS6_R7.1@58.96,194.88 58.242,194.162 DDS6_U4.5@58.242,191.476 58.792,191.476 60.276,189.992 ; v2(59.944,192.659) 61.468,192.659 DDS6_TP10.1@64.135,189.992 60.276,189.992 ; DDS6_R9.1@64.151,186.117 60.276,189.992
  Bottom Layer w0.381: v2(54.483,195.072) 57.531,195.072 v2(59.944,192.659)
DDS6_VDIFF_P: DDS6_R1.1 DDS6_R12.1 DDS6_R25.1 DDS6_TP9.1 DDS6_U4.4 DDS6_U9.1 | length 38.1
  Top Layer w0.381: DDS6_U9.1@50.689,197.459 DDS6_U9.1@50.673,197.443 v2(53.509,197.443) ; DDS6_R25.1@58.023,198.374 DDS6_TP9.1@62.103,198.374 62.168,198.309 DDS6_R1.1@65.024,198.309 ; DDS6_U4.4@58.242,187.108 58.242,185.217 v1(58.293,185.166) 58.801,184.658 DDS6_R12.1@58.801,182.688
  Bottom Layer w0.381: v2(53.509,197.443) 61.172,197.443 DDS6_TP9.1@61.976,198.247 ; v1(58.293,185.166) 61.976,188.849 DDS6_TP9.1@61.976,198.247 ; DDS6_TP9.1@62.103,198.374 DDS6_TP9.1@61.976,198.247
GND: *1.4 *1.14 C18.1 C20.1 C21.1 C22.1 DDS1_C1.1 DDS1_C4.1 DDS1_C5.1 DDS1_C6.1 DDS1_C7.1 DDS1_C8.1 DDS1_C9.1 DDS1_C10.1 DDS1_C11.1 DDS1_C12.1 DDS1_C13.1 DDS1_C14.1 DDS1_C15.1 DDS1_C16.1 DDS1_C17.1 DDS1_C23.1 DDS1_C24.1 DDS1_R6.1 DDS1_R27.2 DDS1_U1.4 DDS1_U1.9 DDS1_U4.1 DDS2_C1.1 DDS2_C4.1 DDS2_C5.1 DDS2_C6.1 DDS2_C7.1 DDS2_C8.1 DDS2_C9.1 DDS2_C10.1 DDS2_C11.1 DDS2_C12.1 DDS2_C13.1 DDS2_C14.1 DDS2_C15.1 DDS2_C16.1 DDS2_C17.1 DDS2_C23.1 DDS2_C24.1 DDS2_R6.1 DDS2_R27.2 DDS2_U1.4 DDS2_U1.9 DDS2_U4.1 DDS3_C1.1 DDS3_C4.1 DDS3_C5.1 DDS3_C6.1 DDS3_C7.1 DDS3_C8.1 DDS3_C9.1 DDS3_C10.1 DDS3_C11.1 DDS3_C12.1 DDS3_C13.1 DDS3_C14.1 DDS3_C15.1 DDS3_C16.1 DDS3_C17.1 DDS3_C23.1 DDS3_C24.1 DDS3_R6.1 DDS3_R27.2 DDS3_U1.4 DDS3_U1.9 DDS3_U4.1 DDS4_C1.1 DDS4_C4.1 DDS4_C5.1 DDS4_C6.1 DDS4_C7.1 DDS4_C8.1 DDS4_C9.1 DDS4_C10.1 DDS4_C11.1 DDS4_C12.1 DDS4_C13.1 DDS4_C14.1 DDS4_C15.1 DDS4_C16.1 DDS4_C17.1 DDS4_C23.1 DDS4_C24.1 DDS4_R6.1 DDS4_R27.2 DDS4_U1.4 DDS4_U1.9 DDS4_U4.1 DDS5_C1.1 DDS5_C4.1 DDS5_C5.1 DDS5_C6.1 DDS5_C7.1 DDS5_C8.1 DDS5_C9.1 DDS5_C10.1 DDS5_C11.1 DDS5_C12.1 DDS5_C13.1 DDS5_C14.1 DDS5_C15.1 DDS5_C16.1 DDS5_C17.1 DDS5_C23.1 DDS5_C24.1 DDS5_R6.1 DDS5_R27.2 DDS5_U1.4 DDS5_U1.9 DDS5_U4.1 DDS6_C1.1 DDS6_C4.1 DDS6_C5.1 DDS6_C6.1 DDS6_C7.1 DDS6_C8.1 DDS6_C9.1 DDS6_C10.1 DDS6_C11.1 DDS6_C12.1 DDS6_C13.1 DDS6_C14.1 DDS6_C15.1 DDS6_C16.1 DDS6_C17.1 DDS6_C23.1 DDS6_C24.1 DDS6_R6.1 DDS6_R27.2 DDS6_U1.4 DDS6_U1.9 DDS6_U4.1 DS2.2 J1.5 J*1.2 R14.1 TP13.1 U6.2 U7.3 U8.2 U8.4 | length 296.8
  Top Layer w0.254: v1(26.871,50.366) DDS1_C4.1@28.418,50.366 30.642,50.366 30.885,50.609 DDS1_U1.4@30.885,51.825 ; v1(26.871,74.561) DDS2_C4.1@28.418,74.561 30.642,74.561 30.885,74.804 DDS2_U1.4@30.885,76.02 ; v1(26.871,98.818) DDS3_C4.1@28.418,98.818 30.642,98.818 30.885,99.061 DDS3_U1.4@30.885,100.277 ; v1(27.379,148.029) DDS4_C4.1@28.926,148.029 31.15,148.029 31.393,148.272 DDS4_U1.4@31.393,149.488 ; v1(27.379,172.159) DDS5_C4.1@28.926,172.159 31.15,172.159 31.393,172.402 DDS5_U1.4@31.393,173.618 ; v1(27.379,196.543) DDS6_C4.1@28.926,196.543 31.15,196.543 31.393,196.786 DDS6_U1.4@31.393,198.002 ; DDS1_U1.9@31.885,47.625 31.885,48.815 32.101,49.031 v1(33.498,49.031) 35.065,49.031 35.26,48.836 DDS1_C13.1@38.308,48.836 ; DDS2_U1.9@31.885,71.82 31.885,73.01 32.154,73.279 v1(33.528,73.279) 35.012,73.279 35.26,73.031 DDS2_C13.1@38.308,73.031 ; DDS3_U1.9@31.885,96.077 31.885,97.267 32.101,97.483 v1(33.498,97.483) 35.065,97.483 35.26,97.288 DDS3_C13.1@38.308,97.288 ; DDS4_U1.9@32.393,145.288 32.393,146.478 32.609,146.694 v1(34.006,146.694) 35.573,146.694 35.768,146.499 DDS4_C13.1@38.816,146.499 ; DDS5_U1.9@32.393,169.418 32.393,170.608 32.609,170.824 v1(34.006,170.824) 35.573,170.824 35.768,170.629 DDS5_C13.1@38.816,170.629 ; DDS6_U1.9@32.393,193.802 32.393,194.992 32.609,195.208 v1(34.006,195.208) 35.573,195.208 35.768,195.013 DDS6_C13.1@38.816,195.013 ; v1(36.449,38.862) 36.449,40.64 DDS1_C1.1@36.576,40.767 ; v1(36.449,63.057) 36.449,64.835 DDS2_C1.1@36.576,64.962 ; v1(36.449,87.314) 36.449,89.092 DDS3_C1.1@36.576,89.219 ; v1(36.957,136.525) 36.957,138.303 DDS4_C1.1@37.084,138.43 ; v1(36.957,160.655) 36.957,162.433 DDS5_C1.1@37.084,162.56 ; v1(36.957,185.039) 36.957,186.817 DDS6_C1.1@37.084,186.944 ; v1(40.64,37.719) 40.643,37.722 DDS1_C6.1@40.643,39.116 ; v1(40.64,61.914) 40.643,61.917 DDS2_C6.1@40.643,63.311 ; v1(40.64,86.171) 40.643,86.174 DDS3_C6.1@40.643,87.568 ; v1(41.148,135.382) 41.151,135.385 DDS4_C6.1@41.151,136.779 ; v1(41.148,159.512) 41.151,159.515 DDS5_C6.1@41.151,160.909 ; v1(41.148,183.896) 41.151,183.899 DDS6_C6.1@41.151,185.293 ; DDS1_R6.1@49.641,39.751 49.641,37.608 v1(49.657,37.592) ; DDS2_R6.1@49.641,64.008 49.641,61.803 v1(49.657,61.787) ; DDS3_R6.1@49.641,88.265 49.641,86.06 v1(49.657,86.044) ; DDS5_R6.1@49.895,161.671 49.895,159.655 v1(50.165,159.385) ; DDS4_R6.1@50.022,137.795 DDS4_R6.1@50.022,137.414 50.022,135.398 v1(50.165,135.255) ; v1(50.165,183.769) 50.276,183.88 DDS6_R6.1@50.276,186.055 ; DDS1_C15.1@52.578,40.259 v1(52.578,41.656) 52.578,43.05 DDS1_C17.1@52.705,43.177 ; DDS2_C15.1@52.578,64.454 v1(52.578,65.851) 52.578,67.245 DDS2_C17.1@52.705,67.372 ; DDS3_C15.1@52.578,88.711 v1(52.578,90.108) 52.578,91.502 DDS3_C17.1@52.705,91.629 ; DDS1_C15.1@52.864,40.419 53.024,40.259 DDS1_C14.1@54.037,40.259 ; DDS2_C15.1@52.865,64.614 53.024,64.454 DDS2_C14.1@54.037,64.454 ; DDS3_C15.1@52.865,88.871 53.024,88.711 DDS3_C14.1@54.037,88.711 ; DDS1_C17.1@53.021,43.307 54.356,43.307 54.356,42.291 v1(54.483,42.164) ; DDS2_C17.1@53.021,67.502 54.356,67.502 54.356,66.486 v1(54.483,66.359) ; DDS3_C17.1@53.021,91.759 54.356,91.759 54.356,90.743 v1(54.483,90.616) ; DDS4_C15.1@53.086,137.922 v1(53.086,139.319) 53.086,140.713 DDS4_C17.1@53.213,140.84 ; DDS5_C15.1@53.086,162.052 v1(53.086,163.449) 53.086,164.843 DDS5_C17.1@53.213,164.97 ; DDS6_C15.1@53.086,186.436 v1(53.086,187.833) 53.086,189.227 DDS6_C17.1@53.213,189.354 ; DDS4_C15.1@53.372,138.082 53.532,137.922 DDS4_C14.1@54.545,137.922 ; DDS5_C15.1@53.372,162.212 53.532,162.052 DDS5_C14.1@54.545,162.052 ; DDS6_C15.1@53.372,186.596 53.532,186.436 DDS6_C14.1@54.545,186.436 ; DDS1_C23.1@53.405,46.736 v2(54.737,46.736) ; DDS2_C23.1@53.405,70.931 v2(54.737,70.931) ; DDS3_C23.1@53.405,95.188 v2(54.737,95.188) ; DDS4_C17.1@53.529,140.97 54.864,140.97 54.864,139.954 v1(54.991,139.827) ; DDS5_C17.1@53.529,165.1 54.864,165.1 54.864,164.084 v1(54.991,163.957) ; DDS6_C17.1@53.529,189.484 54.864,189.484 54.864,188.468 v1(54.991,188.341) ; DDS4_C23.1@53.913,144.399 v2(55.245,144.399) ; DDS5_C23.1@53.913,168.529 v2(55.245,168.529) ; DDS6_C23.1@53.913,192.913 v2(55.245,192.913) ; DDS1_C14.1@54.229,40.259 54.483,40.513 v1(54.483,42.164) ; DDS2_C14.1@54.229,64.454 54.483,64.708 v1(54.483,66.359) ; DDS3_C14.1@54.229,88.711 54.483,88.965 v1(54.483,90.616) ; DDS4_C14.1@54.737,137.922 54.991,138.176 v1(54.991,139.827) ; DDS5_C14.1@54.737,162.052 54.991,162.306 v1(54.991,163.957) ; DDS6_C14.1@54.737,186.436 54.991,186.69 v1(54.991,188.341) ; DDS1_U4.1@55.88,41.25 55.397,41.25 v1(54.483,42.164) ; DDS2_U4.1@55.88,65.445 55.397,65.445 v1(54.483,66.359) ; DDS3_U4.1@55.88,89.702 55.397,89.702 v1(54.483,90.616) ; v1(56.134,112.649) 57.745,112.649 U8.2@57.872,112.522 ; DDS4_U4.1@56.388,138.913 55.905,138.913 v1(54.991,139.827) ; DDS5_U4.1@56.388,163.043 55.905,163.043 v1(54.991,163.957) ; DDS6_U4.1@56.388,187.427 55.905,187.427 v1(54.991,188.341) ; U8.4@60.492,111.572 62.037,111.572 v1(62.103,111.506) ; C22.1@60.579,115.062 v1(61.976,115.062) ; DDS1_C10.1@71.439,34.798 v1(72.771,34.798) ; DDS2_C10.1@71.439,58.993 v1(72.771,58.993) ; DDS3_C10.1@71.439,83.25 v1(72.771,83.25) ; DDS1_C8.1@71.82,46.99 v1(73.152,46.99) ; DDS2_C8.1@71.82,71.185 v1(73.152,71.185) ; DDS3_C8.1@71.82,95.442 v1(73.152,95.442) ; DDS4_C10.1@71.947,132.461 v1(73.279,132.461) ; DDS5_C10.1@71.947,156.591 v1(73.279,156.591) ; DDS6_C10.1@71.947,180.975 v1(73.279,180.975) ; v1(72.009,42.291) DDS1_C9.1@73.468,42.291 ; v1(72.009,66.486) DDS2_C9.1@73.468,66.486 ; v1(72.009,90.743) DDS3_C9.1@73.468,90.743 ; DDS4_C8.1@72.328,144.653 v1(73.66,144.653) ; DDS5_C8.1@72.328,168.783 v1(73.66,168.783) ; DDS6_C8.1@72.328,193.167 v1(73.66,193.167) ; v1(72.517,139.954) DDS4_C9.1@73.976,139.954 ; v1(72.517,164.084) DDS5_C9.1@73.976,164.084 ; v1(72.517,188.468) DDS6_C9.1@73.976,188.468 ; v1(72.644,54.229) DDS1_C7.1@73.976,54.229 ; v1(72.644,78.424) DDS2_C7.1@73.976,78.424 ; v1(72.644,102.681) DDS3_C7.1@73.976,102.681 ; v1(73.152,151.892) DDS4_C7.1@74.484,151.892 ; v1(73.152,176.022) DDS5_C7.1@74.484,176.022 ; v1(73.152,200.406) DDS6_C7.1@74.484,200.406 ; v1(90.805,112.649) v1@90.865,112.709
  Top Layer w0.35: v2(40.275,49.784) DDS1_R27.2@41.799,51.308 ; v2(40.275,73.979) DDS2_R27.2@41.799,75.503 ; v2(40.275,98.236) DDS3_R27.2@41.799,99.76 ; v2(40.783,147.447) DDS4_R27.2@42.307,148.971 ; v2(40.783,171.577) DDS5_R27.2@42.307,173.101 ; v2(40.783,195.961) DDS6_R27.2@42.307,197.485 ; DDS1_C5.1@42.799,45.909 41.34,45.909 v1(41.275,45.974) 42.988,47.687 DDS1_C24.1@44.45,47.687 ; DDS2_C5.1@42.799,70.104 41.34,70.104 v1(41.275,70.169) 42.988,71.882 DDS2_C24.1@44.45,71.882 ; DDS3_C5.1@42.799,94.361 41.34,94.361 v1(41.275,94.426) 42.988,96.139 DDS3_C24.1@44.45,96.139 ; DDS4_C5.1@43.307,143.572 41.848,143.572 v1(41.783,143.637) 43.496,145.35 DDS4_C24.1@44.958,145.35 ; DDS5_C5.1@43.307,167.702 41.848,167.702 v1(41.783,167.767) 43.496,169.48 DDS5_C24.1@44.958,169.48 ; DDS6_C5.1@43.307,192.086 41.848,192.086 v1(41.783,192.151) 43.496,193.864 DDS6_C24.1@44.958,193.864 ; v1(75.822,111.255) C21.1@77.216,111.255 77.401,111.44 U6.2@79.756,111.44 ; v1(77.47,115.443) R14.1@79.788,115.443 ; C18.1@89.027,112.776 89.154,112.649 v1(90.805,112.649) ; v1@90.865,112.709 J1.5@96.393,112.709
  Top Layer w0.5: U7.3@63.844,120.777 65.405,120.777 65.659,120.523 v2(65.659,117.475) 66.421,116.713 C20.1@67.499,116.713 ; DS2.2@76.454,119.798 77.47,118.782 v1(77.47,115.443) ; v2(86.995,124.079) 87.011,124.063 J*1.2@91.038,124.063
NetC18_2: C18.2 J1.1 R16.2 U6.4 | length 15.1
  Top Layer w0.35: U6.4@82.156,110.49 83.045,111.379 R16.2@85.725,111.379 85.728,111.376 C18.2@89.027,111.376 90.294,110.109 J1.1@96.393,110.109
NetC19_1: C19.1 U7.4 | length 4
  Top Layer w0.254: C19.1@60.071,120.142 60.706,119.507 U7.4@63.844,119.507
NetC19_2: C19.2 U7.2 | length 4
  Top Layer w0.254: C19.2@60.071,121.542 60.576,122.047 U7.2@63.844,122.047
NetC21_2: C21.2 J*1.1 S1.1 U6.3 | length 30.6
  Top Layer w0.35: C21.2@77.216,109.855 79.121,109.855 U6.3@79.756,110.49
  Top Layer w0.5: U6.3@79.756,110.49 81.407,108.839 v4(81.407,108.712) ; S1.1@81.534,120.523 89.498,120.523 ; v4(86.741,114.427) 86.741,117.766 89.498,120.523 ; J*1.1@91.038,122.063 89.498,120.523
  Bottom Layer w0.5: v4(81.407,108.712) 86.741,114.046 v4(86.741,114.427)
NetDDS1_C1_2: DDS1_C1.2 DDS1_R5.2 DDS1_U3.3 | length 5.7
  Top Layer w0.254: DDS1_R5.2@33.766,43.18 35.036,41.91 DDS1_C1.2@36.319,41.91 ; DDS1_C1.2@36.449,41.848 38.982,41.848 DDS1_U3.3@39.031,41.799
NetDDS1_C2_1: DDS1_C2.1 DDS1_C3.1 DDS1_U3.1 DDS1_U3.2 | length 10.6
  Top Layer w0.254: DDS1_C3.1@36.641,45.528 37.842,45.528 DDS1_U3.1@39.031,44.339 ; DDS1_U3.1@39.158,44.323 39.158,43.011 DDS1_C2.1@43.688,38.481
NetDDS1_C2_2: DDS1_C2.2 DDS1_R6.2 DDS1_U3.5 | length 5.5
  Top Layer w0.254: DDS1_U3.5@44.775,40.481 44.727,40.529 DDS1_U3.5@44.281,40.529 45.059,39.751 ; DDS1_C2.2@45.15,38.481 45.15,39.66 45.059,39.751 ; DDS1_R6.2@47.641,39.751 45.059,39.751
NetDDS1_C3_2: DDS1_C3.2 DDS1_R4.2 DDS1_R5.1 | length 7.4
  Top Layer w0.254: DDS1_R4.2@31.861,40.513 31.766,40.608 31.766,43.18 34.433,45.847 DDS1_C3.2@35.368,45.847
NetDDS1_C4_2: DDS1_C4.2 DDS1_U1.3 | length 5
  Top Layer w0.254: DDS1_C4.2@28.418,48.966 30.004,48.966 31.385,50.347 DDS1_U1.3@31.385,51.825
NetDDS1_P2_1: DDS1_P2.1 DDS1_R19.2 | length 2.4
  Top Layer w0.5: DDS1_P2.1@90.17,49.53 90.424,49.784 DDS1_R19.2@90.424,51.832
NetDDS1_P2_3: DDS1_P2.3 DDS1_R18.2 | length 2.5
  Top Layer w0.5: DDS1_P2.3@87.63,49.53 87.757,49.657 DDS1_R18.2@87.757,51.959
NetDDS1_P2_5: DDS1_P2.5 DDS1_R11.2 | length 2.5
  Top Layer w0.5: DDS1_P2.5@85.09,49.53 84.963,49.657 85.09,49.784 DDS1_R11.2@85.09,51.959
NetDDS1_P2_7: DDS1_P2.7 DDS1_R3.1 | length 2.4
  Top Layer w0.5: DDS1_P2.7@82.359,49.721 82.55,49.911 DDS1_R3.1@82.55,52.086
NetDDS1_P3_1: DDS1_P3.1 DDS1_R23.1 | length 2.7
  Top Layer w0.254: DDS1_R23.1@82.423,36.56 82.423,39.116 DDS1_P3.1@82.55,39.243
NetDDS1_P3_3: DDS1_P3.3 DDS1_R22.2 | length 2.7
  Top Layer w0.254: DDS1_R22.2@84.963,36.56 DDS1_P3.3@84.963,39.116
  Top Layer w0.5: DDS1_P3.3@84.963,39.116 DDS1_P3.3@85.09,39.243
NetDDS1_P3_5: DDS1_P3.5 DDS1_R21.2 | length 2.7
  Top Layer w0.254: DDS1_P3.5@87.63,39.243 87.757,39.116 DDS1_R21.2@87.757,36.56
NetDDS1_P3_7: DDS1_P3.7 DDS1_R20.2 | length 2.8
  Top Layer w0.254: DDS1_P3.7@90.17,39.243 90.424,38.989 DDS1_R20.2@90.424,36.56
NetDDS1_R1_2: DDS1_R1.2 DDS1_R2.1 DDS1_U2.2 | length 14.3
  Top Layer w0.254: DDS1_R1.2@66.643,52.451 68.294,50.8 70.993,50.8 75.295,46.498 DDS1_R2.1@78.486,46.498
NetDDS1_R2_2: DDS1_R2.2 DDS1_R3.2 DDS1_R11.1 DDS1_R18.1 DDS1_R19.1 DDS1_U2.1 | length 29.9
  Top Layer w0.5: DDS1_U2.1@70.146,52.132 70.146,53.763 71.501,55.118 78.359,55.118 ; DDS1_R2.2@78.359,48.179 78.359,55.118 ; DDS1_R19.1@90.424,53.832 87.884,53.832 DDS1_R18.1@87.757,53.959 DDS1_R11.1@85.09,53.959 82.677,53.959 DDS1_R3.2@82.55,54.086 81.518,55.118 78.359,55.118
NetDDS1_R4_1: DDS1_R4.1 DDS1_TP3.1 DDS1_U1.10 | length 11.5
  Top Layer w0.254: DDS1_TP3.1@26.924,40.259 26.989,40.194 DDS1_R4.1@29.734,40.194 29.591,40.337 29.591,43.815 32.385,46.609 DDS1_U1.10@32.385,47.625
NetDDS1_R7_2: DDS1_R7.2 DDS1_R8.1 DDS1_U2.3 | length 12.1
  Top Layer w0.254: DDS1_R7.2@60.579,49.022 62.23,50.673 66.04,50.673 66.516,50.197 DDS1_R8.1@66.516,49.022 ; DDS1_R8.1@66.389,48.703 67.278,49.592 DDS1_U2.3@70.146,49.592
NetDDS1_R9_2: DDS1_R9.2 DDS1_R10.1 DDS1_U5.2 | length 16.1
  Top Layer w0.254: DDS1_R9.2@65.77,40.259 67.04,38.989 71.374,38.989 v2(72.263,38.1) ; v2(75.819,33.274) 76.216,33.274 DDS1_R10.1@77.613,34.671
  Bottom Layer w0.254: v2(72.263,38.1) 75.819,34.544 v2(75.819,33.274)
NetDDS1_R10_2: DDS1_R10.2 DDS1_R20.1 DDS1_R21.1 DDS1_R22.1 DDS1_R23.2 DDS1_U5.1 | length 28
  Top Layer w0.254: v2(67.818,40.132) 67.945,40.259 69.573,40.259 DDS1_U5.1@69.638,40.194 ; v2(79.629,36.576) 79.613,36.56 DDS1_R10.2@79.613,34.671 82.312,34.671 DDS1_R23.2@82.423,34.56 DDS1_R22.1@84.963,34.56 DDS1_R21.1@87.757,34.56 DDS1_R20.1@90.424,34.56
  Bottom Layer w0.254: v2(67.818,40.132) 76.073,40.132 v2(79.629,36.576)
NetDDS1_R12_2: DDS1_R12.2 DDS1_R13.1 DDS1_U5.3 | length 11.1
  Top Layer w0.254: DDS1_R12.2@60.42,36.83 61.214,36.83 62.611,38.227 65.024,38.227 65.754,37.497 65.754,36.83 68.622,36.83 69.446,37.654 DDS1_U5.3@69.638,37.654
NetDDS1_R25_2: DDS1_R25.2 DDS1_R26.1 DDS1_U9.2 | length 9.8
  Top Layer w0.254: DDS1_U9.2@48.895,51.266 48.895,51.562 49.657,52.324 DDS1_R25.2@55.388,52.324 55.388,50.911 56.261,50.038 DDS1_R26.1@56.261,50.022
NetDDS1_R27_1: DDS1_R27.1 DDS1_U9.3 | length 5
  Top Layer w0.254: DDS1_R27.1@43.799,51.308 43.815,51.308 44.958,52.451 46.736,52.451 47.625,51.562 DDS1_U9.3@47.625,51.266
NetDDS1_R28_1: DDS1_R28.1 DDS1_U9.5 | length 2.4
  Top Layer w0.254: DDS1_U9.5@46.355,46.016 46.355,45.228 DDS1_R28.1@47.514,44.069
NetDDS2_C1_2: DDS2_C1.2 DDS2_R5.2 DDS2_U3.3 | length 5.7
  Top Layer w0.254: DDS2_R5.2@33.766,67.375 35.036,66.105 DDS2_C1.2@36.319,66.105 ; DDS2_C1.2@36.449,66.043 38.982,66.043 DDS2_U3.3@39.031,65.994
NetDDS2_C2_1: DDS2_C2.1 DDS2_C3.1 DDS2_U3.1 DDS2_U3.2 | length 10.6
  Top Layer w0.254: DDS2_C3.1@36.641,69.723 37.842,69.723 DDS2_U3.1@39.031,68.534 ; DDS2_U3.1@39.158,68.518 39.158,67.206 DDS2_C2.1@43.688,62.676
NetDDS2_C2_2: DDS2_C2.2 DDS2_R6.2 DDS2_U3.5 | length 5.4
  Top Layer w0.254: DDS2_U3.5@44.775,64.676 44.727,64.724 DDS2_U3.5@44.281,64.724 45.15,63.855 ; DDS2_C2.2@45.15,62.738 45.15,63.855 ; DDS2_R6.2@47.641,64.008 45.303,64.008 45.15,63.855
NetDDS2_C3_2: DDS2_C3.2 DDS2_R4.2 DDS2_R5.1 | length 7.4
  Top Layer w0.254: DDS2_R4.2@31.861,64.708 31.766,64.803 31.766,67.375 34.433,70.042 DDS2_C3.2@35.368,70.042
NetDDS2_C4_2: DDS2_C4.2 DDS2_U1.3 | length 5
  Top Layer w0.254: DDS2_C4.2@28.418,73.161 30.004,73.161 31.385,74.542 DDS2_U1.3@31.385,76.02
NetDDS2_P2_1: DDS2_P2.1 DDS2_R19.2 | length 2.4
  Top Layer w0.5: DDS2_P2.1@90.17,73.725 90.424,73.979 DDS2_R19.2@90.424,76.027
NetDDS2_P2_3: DDS2_P2.3 DDS2_R18.2 | length 2.5
  Top Layer w0.5: DDS2_P2.3@87.63,73.725 87.757,73.852 DDS2_R18.2@87.757,76.154
NetDDS2_P2_5: DDS2_P2.5 DDS2_R11.2 | length 2.5
  Top Layer w0.5: DDS2_P2.5@85.09,73.725 84.963,73.852 85.09,73.979 DDS2_R11.2@85.09,76.154
NetDDS2_P2_7: DDS2_P2.7 DDS2_R3.1 | length 2.4
  Top Layer w0.5: DDS2_P2.7@82.36,73.915 82.55,74.106 DDS2_R3.1@82.55,76.281
NetDDS2_P3_1: DDS2_P3.1 DDS2_R23.1 | length 2.7
  Top Layer w0.254: DDS2_R23.1@82.423,60.755 82.423,63.311 DDS2_P3.1@82.55,63.438
NetDDS2_P3_3: DDS2_P3.3 DDS2_R22.2 | length 2.7
  Top Layer w0.254: DDS2_R22.2@84.963,60.755 DDS2_P3.3@84.963,63.311
  Top Layer w0.5: DDS2_P3.3@84.963,63.311 DDS2_P3.3@85.09,63.438
NetDDS2_P3_5: DDS2_P3.5 DDS2_R21.2 | length 2.7
  Top Layer w0.254: DDS2_P3.5@87.63,63.438 87.757,63.311 DDS2_R21.2@87.757,60.755
NetDDS2_P3_7: DDS2_P3.7 DDS2_R20.2 | length 2.8
  Top Layer w0.254: DDS2_P3.7@90.17,63.438 90.424,63.184 DDS2_R20.2@90.424,60.755
NetDDS2_R1_2: DDS2_R1.2 DDS2_R2.1 DDS2_U2.2 | length 14.3
  Top Layer w0.254: DDS2_R1.2@66.643,76.646 68.294,74.995 70.993,74.995 75.295,70.693 DDS2_R2.1@78.486,70.693
NetDDS2_R2_2: DDS2_R2.2 DDS2_R3.2 DDS2_R11.1 DDS2_R18.1 DDS2_R19.1 DDS2_U2.1 | length 29.9
  Top Layer w0.5: DDS2_U2.1@70.146,76.327 70.146,77.958 71.501,79.313 78.359,79.313 ; DDS2_R2.2@78.359,72.374 78.359,79.313 ; DDS2_R19.1@90.424,78.027 87.884,78.027 DDS2_R18.1@87.757,78.154 DDS2_R11.1@85.09,78.154 82.677,78.154 DDS2_R3.2@82.55,78.281 81.518,79.313 78.359,79.313
NetDDS2_R4_1: DDS2_R4.1 DDS2_TP3.1 DDS2_U1.10 | length 11.5
  Top Layer w0.254: DDS2_TP3.1@26.924,64.454 26.989,64.389 DDS2_R4.1@29.734,64.389 29.591,64.532 29.591,68.01 32.385,70.804 DDS2_U1.10@32.385,71.82
NetDDS2_R7_2: DDS2_R7.2 DDS2_R8.1 DDS2_U2.3 | length 12.1
  Top Layer w0.254: DDS2_R7.2@60.579,73.217 62.23,74.868 66.04,74.868 66.516,74.392 DDS2_R8.1@66.516,73.217 ; DDS2_R8.1@66.389,72.898 67.278,73.787 DDS2_U2.3@70.146,73.787
NetDDS2_R9_2: DDS2_R9.2 DDS2_R10.1 DDS2_U5.2 | length 16.1
  Top Layer w0.254: DDS2_R9.2@65.77,64.454 67.04,63.184 71.374,63.184 v2(72.263,62.295) ; v2(75.819,57.469) 76.216,57.469 DDS2_R10.1@77.613,58.866
  Bottom Layer w0.254: v2(72.263,62.295) 75.819,58.739 v2(75.819,57.469)
NetDDS2_R10_2: DDS2_R10.2 DDS2_R20.1 DDS2_R21.1 DDS2_R22.1 DDS2_R23.2 DDS2_U5.1 | length 28
  Top Layer w0.254: v2(67.818,64.327) 67.945,64.454 69.573,64.454 DDS2_U5.1@69.638,64.389 ; v2(79.629,60.771) 79.613,60.755 DDS2_R10.2@79.613,58.866 82.312,58.866 DDS2_R23.2@82.423,58.755 DDS2_R22.1@84.963,58.755 DDS2_R21.1@87.757,58.755 DDS2_R20.1@90.424,58.755
  Bottom Layer w0.254: v2(67.818,64.327) 76.073,64.327 v2(79.629,60.771)
NetDDS2_R12_2: DDS2_R12.2 DDS2_R13.1 DDS2_U5.3 | length 11.1
  Top Layer w0.254: DDS2_R12.2@60.42,61.025 61.214,61.025 62.611,62.422 65.024,62.422 65.754,61.692 65.754,61.025 68.622,61.025 69.446,61.849 DDS2_U5.3@69.638,61.849
NetDDS2_R25_2: DDS2_R25.2 DDS2_R26.1 DDS2_U9.2 | length 9.7
  Top Layer w0.254: DDS2_U9.2@48.895,75.461 48.895,75.757 49.592,76.454 DDS2_R25.2@55.515,76.454 55.515,75.152 DDS2_R26.1@56.388,74.279
NetDDS2_R27_1: DDS2_R27.1 DDS2_U9.3 | length 5
  Top Layer w0.254: DDS2_R27.1@43.799,75.503 43.815,75.503 44.958,76.646 46.736,76.646 47.625,75.757 DDS2_U9.3@47.625,75.461
NetDDS2_R28_1: DDS2_R28.1 DDS2_U9.5 | length 2.4
  Top Layer w0.254: DDS2_U9.5@46.355,70.211 46.355,69.423 DDS2_R28.1@47.514,68.264